# Altium PCB PCBdis.PcbDoc
Units mil, origin at the board's own origin, x right, y up, seen from the top; angles counter-clockwise.
Board outline 3820 x 2995 mil, 2 copper layers (Top Layer, Bottom Layer); 31 components, 39 nets, 172 pads, 23 vias.
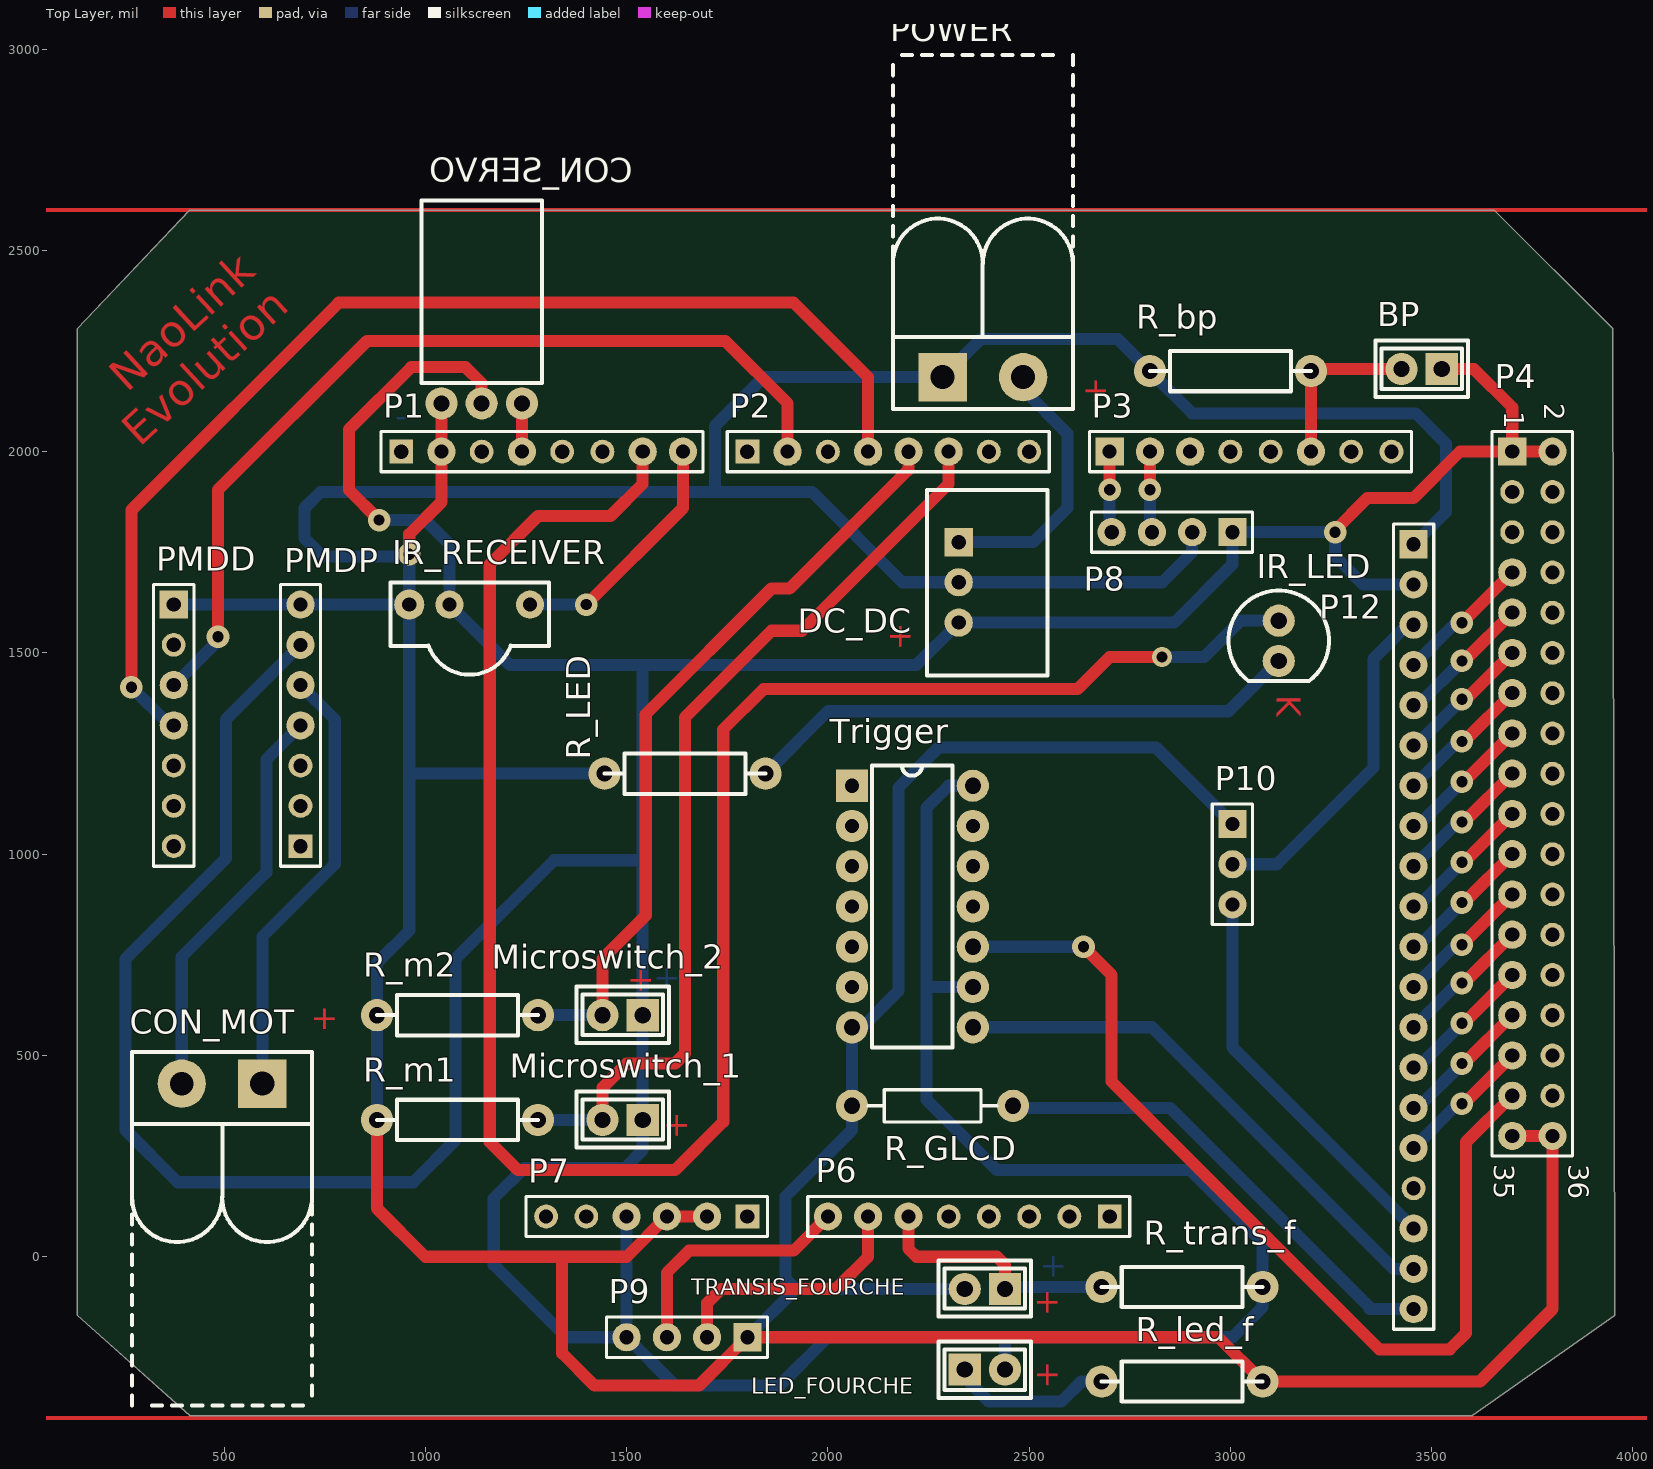
[diagram p0: Top Layer view]
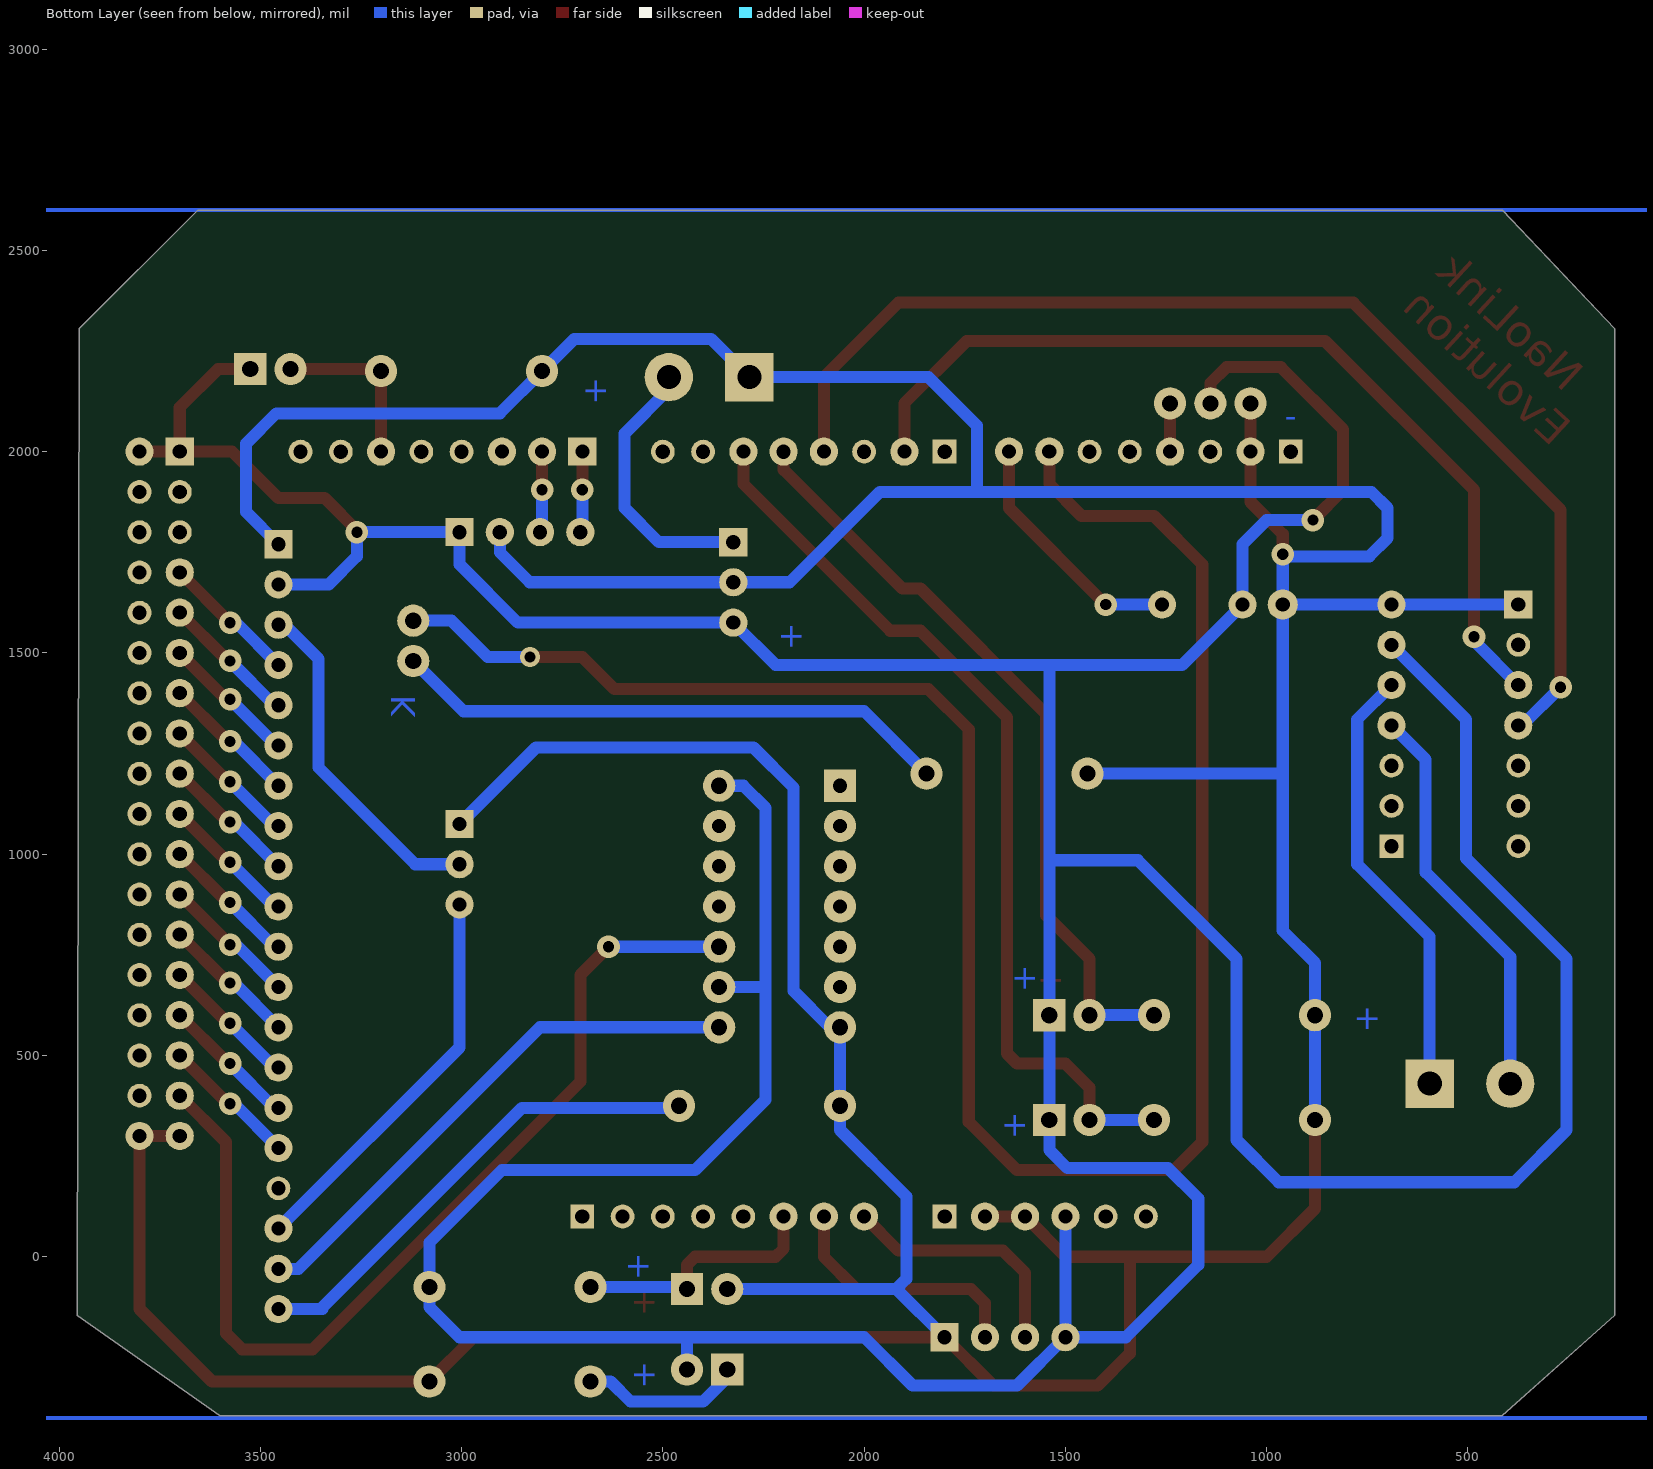
[diagram p1: Bottom Layer view, seen from below]

## Layer stack, top to bottom
Top Solder: solder mask 0.4, Solder Resist, Dk 3.5
Top Layer: signal copper 1.4
Dielectric1: dielectric 12.6, FR-4, Dk 4.8
Bottom Layer: signal copper 1.4
Bottom Solder: solder mask 0.4, Solder Resist, Dk 3.5

## Board outline
3655,2600 3950,2305 3955,-145 3600,-395 415,-395 135,-145 135,570 135,1265 135,2305 415,2600

## Design rules (kind name [scope] priority, off if disabled: settings)
Clearance Clearance_plan [InPolygon] p1: gap=20
Clearance Clearance_1 [All] p2: gap=10
PolygonConnect [All] p1: connectstyle=Relief reliefconductorwidth=10 reliefentries=4 polygonreliefangle="90 Angle" airgapwidth=10
RoomDefinition Sheet_distributeur [InNet('GND')] p1: confinementstyle=ConfineIn formatcopy=TRUE lockcomponents=FALSE outline 565,-490 745,-490 745,-575 565,-575
RoutingVias [All] p1: holewidth=28 width=50 viastyle="Through Hole" minholewidth=28 minwidth=50 maxholewidth=28 maxwidth=50
SilkToSolderMaskClearance SilkscreenOverComponentPads [IsPad] p1: minsilkscreentomaskgap=10 clearancetoexposedcopper=TRUE
SolderMaskExpansion [All] p1: expansion=4
Width [All] p1: maxlimit=30 minlimit=10 preferedwidth=30 minimp=50.000000 maximp=50.000000 favimp=50.000000
28 further rules are at their usual default settings.

## Components (designator, comment, footprint, x,y, rotation, side; value= is the part's Value field where it differs from the comment)
BP "Connecteur bipastille" Conn_SIG_2pts 3525,2205 r0 top
CON_MOT "Alim" "Miniconnect 2pts"#1 595,430 r270 top
CON_SERVO "Connecteur Autocom 3pts" "Autocom HE14 - 3 - Coudé" 1240,2120 r90 top
DC_DC "TSR 1-2450" TSR-1 2325,1775 r270 top
IR_LED "générique" LED-5 3120,1480 r90 top
IR_RECEIVER "TSOP 31236" "TSOP 31236" 960,1620 r90 top
LED_FOURCHE "Connecteur bipastille" Conn_SIG_2pts 2340,-280 r180 top
Microswitch_1 "Connecteur bipastille" Conn_SIG_2pts 1540,340 r0 top
Microswitch_2 "Connecteur bipastille" Conn_SIG_2pts 1540,600 r0 top
P1 "con_pwm_8_13" HDR1X8#1 940,2000 r0 top
P2 "con_pwm_0_7" HDR1X8#2 1800,2000 r0 top
P3 "con_comm_14_21" HDR1X8#3 2700,2000 r0 top
P4 "con_digital" HDR2X18 3700,2000 r270 top
P6 "con_analog_0_7" HDR1X8#4 2700,100 r180 top
P7 "con_power" HDR1X6 1800,100 r180 top
P8 "CON_BT" HDR1X4#1 3005,1800 r180 top
P9 "CON_JAUGE" HDR1X4#2 1800,-200 r180 top
P10 "pot_lcd" HDR1X3 3005,1075 r270 top
P12 "CON_GLCD" HDR1X20 3455,1770 r270 top
PMDD "MOTOR_DRIVER_DATA" HDR1X7#1 375,1620 r270 top
PMDP "MOTOR_DRIVER_POWER" HDR1X7#2 690,1020 r90 top
POWER "Alim" "Miniconnect 2pts"#2 2285,2185 r90 top
R_bp "1K" Axial_4 3200,2200 r180 top
R_GLCD "220" AXIAL-0.4 2260,375 r0 top
R_LED "100" Axial_4 1445,1200 r0 top
R_led_f "660" Axial_4 2680,-310 r0 top
R_m1 "1K" Axial_4 1280,340 r180 top
R_m2 "1K" Axial_4 1280,600 r180 top
R_trans_f "27k" Axial_4 2680,-75 r0 top
TRANSIS_FOURCHE "Connecteur bipastille" Conn_SIG_2pts 2440,-80 r0 top
Trigger "74HC126" DIP_14 2060,1170 r0 top

## Footprints (in the part's own frame and the unit in brackets; to place one, negate y for a bottom-side part, rotate by r counter-clockwise, add the part's x,y. Pads: shape width x height; smd on the part's side, far side on the other; paste and mask are expansions set on the pad)
"Autocom HE14 - 3 - Coudé" [mil] "Connecteur 3 points Autocom série HE14, coudé"
  round 80 hole 40: 1(0,0) 2(0,100) 3(0,200)
  silkscreen extent 50,-50 504,250, body extent -13,-50 503,250, height 313
AXIAL-0.4 [mil] "Axial Device, Thru-Hole; 2 Leads; 0.4 in Pin Spacing"
  round 80 hole 40: 1(-200,0) 2(200,0)
  silkscreen extent -160,-40 160,40
Axial_4 [mil] "Résistance 1/4 ou 1/2 Watt"
  round 80 hole 40: 1(0,0) 2(400,0)
  silkscreen extent 0,-50 400,50, body extent -12,-45 412,46, height 116
Conn_SIG_2pts [mil] "connecteur pour composants déportés faible puissance"
  rect 80x80 hole 40: 1(0,0)
  round 80 hole 40: 2(-100,0)
  silkscreen extent -165,-69 65,71
DIP_14 [mil]
  rect 80x80 hole 35: 1(0,0)
  round 80 hole 35: 2(0,-100) 3(0,-200) 4(0,-300) 5(0,-400) 6(0,-500) 11(300,-300) 12(300,-200) 13(300,-100)
  round 80 hole 40: 7(0,-600) 8(300,-600) 9(300,-500) 10(300,-400) 14(300,0)
  silkscreen extent 49,-650 249,50
HDR1X3 [mil] "Connector; Header; 3 Position"
  rect 70x70 hole 35: 1(0,0)
  round 70 hole 35.43: 2(100,0) 3(200,0)
  silkscreen extent -50,-50 250,50
HDR1X4#1 [mil] "Connector; Header; 4 Position"
  rect 70x70 hole 35.43: 1(0,0)
  round 70 hole 35.43: 2(100,0) 3(200,0) 4(300,0)
  silkscreen extent -50,-50 350,50
HDR1X4#2 [mil] "Connector; Header; 4 Position"
  rect 70x70 hole 35: 1(0,0)
  round 70 hole 35: 2(100,0) 3(200,0) 4(300,0)
  silkscreen extent -50,-50 350,50
HDR1X6 [mil] "Connector; Header; 6 Position"
  rect 59.06x59.06 hole 35.43: 1(0,0)
  round 70 hole 35: 2(100,0) 3(200,0) 4(300,0)
  round 59.06 hole 35.43: 5(400,0) 6(500,0)
  silkscreen extent -50,-50 550,50
HDR1X7#1 [mm] "Connector; Header; 7 Position"
  rect 1.778x1.778 hole 0.889: 1(0,0)
  round 1.5 hole 0.9: 2(2.54,0) 5(10.16,0) 6(12.7,0) 7(15.24,0)
  round 1.778 hole 0.889: 3(5.08,0) 4(7.62,0)
  silkscreen extent -1.27,-1.27 16.51,1.27
HDR1X7#2 [mm] "Connector; Header; 7 Position"
  rect 1.5x1.5 hole 0.9: 1(0,0)
  round 1.5 hole 0.9: 2(2.54,0) 3(5.08,0)
  round 1.778 hole 0.889: 4(7.62,0) 5(10.16,0) 6(12.7,0) 7(15.24,0)
  silkscreen extent -1.27,-1.27 16.51,1.27
HDR1X8#1 [mil] "Connector; Header; 8 Position"
  rect 59.06x59.06 hole 35.43: 1(0,0)
  round 70 hole 35: 2(100,0) 4(300,0) 7(600,0) 8(700,0)
  round 59.06 hole 35.43: 3(200,0) 5(400,0) 6(500,0)
  silkscreen extent -50,-50 750,50
HDR1X8#2 [mil] "Connector; Header; 8 Position"
  rect 59.06x59.06 hole 35.43: 1(0,0)
  round 70 hole 35: 2(100,0) 4(300,0) 6(500,0)
  round 59.06 hole 35.43: 3(200,0) 7(600,0) 8(700,0)
  round 70 hole 35.43: 5(400,0)
  silkscreen extent -50,-50 750,50
HDR1X8#3 [mil] "Connector; Header; 8 Position"
  rect 70x70 hole 35: 1(0,0)
  round 70 hole 35: 2(100,0) 3(200,0) 6(500,0)
  round 59.06 hole 35.43: 4(300,0) 5(400,0) 7(600,0) 8(700,0)
  silkscreen extent -50,-50 750,50
HDR1X8#4 [mil] "Connector; Header; 8 Position"
  rect 59.06x59.06 hole 35.43: 1(0,0)
  round 59.06 hole 35.43: 2(100,0) 3(200,0) 4(300,0) 5(400,0)
  round 70 hole 35: 6(500,0) 7(600,0) 8(700,0)
  silkscreen extent -50,-50 750,50
HDR1X20 [mil] "Connector; Header; 20 Position"
  rect 70x70 hole 35: 1(0,0)
  round 70 hole 35: 2(100,0) 3(200,0) 4(300,0) 5(400,0) 6(500,0) 7(600,0) 8(700,0) 9(800,0) 10(900,0) 11(1000,0) 12(1100,0) 13(1200,0) 14(1300,0) 15(1400,0) 16(1500,0) 18(1700,0) 19(1800,0) 20(1900,0)
  round 59.06 hole 35.43: 17(1600,0)
  silkscreen extent -50,-50 1950,50
HDR2X18 [mil] "Connector; Header; 18x2 Position"
  rect 70x70 hole 35: 1(0,0)
  round 70 hole 35: 2(0,100) 7(300,0) 9(400,0) 11(500,0) 13(600,0) 15(700,0) 17(800,0) 19(900,0) 21(1000,0) 23(1100,0) 25(1200,0) 27(1300,0) 29(1400,0) 31(1500,0) 33(1600,0) 35(1700,0) 36(1700,100)
  round 59.06 hole 35.43: 3(100,0) 4(100,100) 5(200,0) 6(200,100) 8(300,100) 10(400,100) 12(500,100) 14(600,100) 16(700,100) 18(800,100) 20(900,100) 22(1000,100) 24(1100,100) 26(1200,100) 28(1300,100) 30(1400,100) 32(1500,100) 34(1600,100)
  silkscreen extent -50,-50 1750,150
LED-5 [mil] "Led trous traversant diamètre 5mm"
  round 80 hole 40: 1(0,0) 2(100,0)
  silkscreen extent -50,-125 175,125, body extent -46,-118 168,119, height 485
"Miniconnect 2pts"#1 [mil] "Connecteur Entrelec Miniconnect 2 points"
  rect 120x120 hole 60: 1(0,0)
  round 120 hole 59.06: 2(0,-200)
  silkscreen extent -79,-324 800,124, body extent -79,-339 394,140, height 339
"Miniconnect 2pts"#2 [mil] "Connecteur Entrelec Miniconnect 2 points"
  rect 120x120 hole 60: 1(0,0)
  round 120 hole 60: 2(0,-200)
  silkscreen extent -79,-324 800,124, body extent -79,-339 394,140, height 339
"TSOP 31236" [mil] "Récepteur IR 950nm"
  round 75 hole 35: 1(0,0)
  round 70 hole 35: 2(0,-100) 3(0,-300)
  silkscreen extent -174,-347 55,47
TSR-1 [mil] "DC/DC Converters  TSR-1 Series - Footprint"
  rect 70x70 hole 35: 1(0,0)
  round 70 hole 35: 2(99.41,0) 3(199.8,0)
  silkscreen extent -130,-79 331,220, body extent -131,-78 330,221, height 402

## Part data
BP LED_FOURCHE Microswitch_1 Microswitch_2 TRANSIS_FOURCHE: "Double pastilles pour souder un moteur"
CON_MOT POWER: library part "Connecteur Alimentation", "Connecteur d'alimentation"
CON_SERVO: library part "Connecteur Autocom 3 pts", "connecteur autocom HE14 3 pts"
DC_DC: "DC/DC Converters  TSR-1 Series, 1 A"
IR_LED: library part "LED générique", "Typical GaAs LED Yellow"
IR_RECEIVER: "Récepteur IR 36KHz 950nm"
P1 P2 P3 P6: library part "Header 8", "Header, 8-Pin"
P4: library part "Header 18X2", "Header, 18-Pin, Dual row"
P7: library part "Header 6", "Header, 6-Pin"
P8 P9: library part "Header 4", "Header, 4-Pin"
P10: library part "Header 3", "Header, 3-Pin"
P12: library part "Header 20", "Header, 20-Pin"
PMDD PMDP: library part "Header 7", "Header, 7-Pin"
R_bp R_LED R_led_f R_m1 R_m2 R_trans_f: library part Res, "Resistance"
R_GLCD: library part Res2, "Resistor"
Trigger: library part 74XX126, "Quad Buffer/line driver; 3-state"

## Via types
v1: diameter 56, hole 28, Top Layer to Bottom Layer, 22 vias
v2: diameter 50, hole 28, Top Layer to Bottom Layer, 1 vias

## Nets (pads, with @x,y where several pads share a name; then routed paths per layer and width w, separated by ;. In a path a pad name is that pad's centre, name@x,y a point inside that pad or via, vN(x,y) a via of type N, cw(c..) or ccw(c..) an arc to the next point about the centre after c; other vN are vias at no path point)
12V: DC_DC.1 POWER.2 | length 675.8
  Bottom Layer w30: DC_DC.1 2510,1775 2595,1860 2595,2045 2485,2155 POWER.2
A: P12.19 Trigger.8 | length 1343.5
  Bottom Layer w30: Trigger.8 2805,570 3405,-30 P12.19
CS1: P4.29 P12.15 | length 328.2
  Top Layer w30: v1@3585,485 P4.29
  Bottom Layer w30: P12.15 3465,370 v1(3575,480)
CS2: P4.31 P12.16 | length 328.2
  Top Layer w30: v1@3585,385 P4.31
  Bottom Layer w30: P12.16 3565,380 v1(3575,380)
DB0: P4.13 P12.7 | length 328.2
  Top Layer w30: v1@3585,1285 P4.13
  Bottom Layer w30: P12.7 3565,1280 v1(3575,1280)
DB1: P4.15 P12.8 | length 328.2
  Top Layer w30: v1@3585,1185 P4.15
  Bottom Layer w30: P12.8 3465,1070 v1(3575,1180)
DB2: P4.17 P12.9 | length 328.2
  Top Layer w30: v1@3585,1085 P4.17
  Bottom Layer w30: P12.9 3565,1080 v1(3575,1080)
DB3: P4.19 P12.10 | length 328.2
  Top Layer w30: v1@3585,985 P4.19
  Bottom Layer w30: P12.10 3465,870 v1(3575,980)
DB4: P4.21 P12.11 | length 328.2
  Top Layer w30: v1@3585,885 P4.21
  Bottom Layer w30: P12.11 3465,770 v1(3575,880)
DB5: P4.23 P12.12 | length 326.1
  Top Layer w30: v1@3585,785 P4.23
  Bottom Layer w30: P12.12 3560,775 v1(3575,775)
DB6: P4.25 P12.13 | length 328.2
  Top Layer w30: v1@3585,685 P4.25
  Bottom Layer w30: P12.13 3565,680 v1(3575,680)
DB7: P4.27 P12.14 | length 328.2
  Top Layer w30: v1@3585,585 P4.27
  Bottom Layer w30: P12.14 3465,470 v1(3575,580)
DT: P6.8 P9.3 | length 618
  Top Layer w30: P9.3 1600,-40 1655,15 1915,15 P6.8
E_EN: P4.11 P12.6 | length 330.3
  Top Layer w30: v1@3585,1385 P4.11
  Bottom Layer w30: P12.6 3460,1270 v1(3575,1385)
GND: CON_SERVO.3 DC_DC.2 IR_RECEIVER.1 P1.2 P4.35 P4.36 P7.2 P7.3 P8.2 P9.1 P10.1 P12.1 PMDD.1 PMDP.7 POWER.1 R_bp.2 R_GLCD.1 R_LED.1 R_led_f.2 R_m1.2 R_m2.2 TRANSIS_FOURCHE.2 Trigger.7 | length 15619.2
  Top Layer w30: R_m1.2 880,120 1000,0 1340,0 ; v1(960,1745) 960,1795 1040,1875 P1.2 CON_SERVO.3 ; P7.2 P7.3 1500,0 1340,0 ; P4.35 P4.36 3800,-130 3620,-310 R_led_f.2 2970,-200 P9.1 1680,-320 1420,-320 1340,-240 1340,0
  Bottom Layer w30: PMDD.1 PMDP.7 IR_RECEIVER.1 ; R_m1.2 R_m2.2 880,730 960,810 960,1205 ; R_LED.1 965,1200 960,1205 ; P9.1 1920,-80 ; TRANSIS_FOURCHE.2 1920,-80 ; P8.2 2905,1750 2830.59,1675.59 DC_DC.2 2185,1675.59 1960.59,1900 1720,1900 ; P10.1 2815,1265 2275,1265 2175,1165 2175,660 2085,570 Trigger.7 R_GLCD.1 2060,315 1895,150 1895,-55 1920,-80 ; P12.1 3535,1850 3535,2020 3460,2095 2905,2095 R_bp.2 2720,2280 2380,2280 POWER.1 1840,2185 1720,2065 1720,1900 ; 960,1205 IR_RECEIVER.1 ; IR_RECEIVER.1 v1(960,1745) 955,1740 745,1740 700,1785 700,1860 740,1900 1720,1900
IR_RECEIV: IR_RECEIVER.3 P1.8 | length 619.4
  Top Layer w30: v1(1400,1620) 1640,1860 P1.8
  Bottom Layer w30: IR_RECEIVER.3 v1(1400,1620)
IR_TRANS: IR_LED.2 P1.7 | length 5103.4
  Top Layer w30: P1.7 1540,1920 1460,1840 1280,1840 1160,1720 1160,285 1230,215 1620,215 1740,335 1740,1310 1840,1410 2620,1410 2700,1490 v2(2830,1490)
  Bottom Layer w30: v2(2830,1490) 2935,1490 3025,1580 IR_LED.2
NetCON_MOT_1: CON_MOT.1 PMDP.5 | length 1099.8
  Bottom Layer w30: CON_MOT.1 595,795 775,975 775,1335 PMDP.5
NetCON_MOT_2: CON_MOT.2 PMDP.4 | length 1012.2
  Bottom Layer w30: CON_MOT.2 395,745 605,955 605,1235 PMDP.4
NetIR_LED_1: IR_LED.1 R_LED.2 | length 1391
  Bottom Layer w30: R_LED.2 2000,1355 2995,1355 IR_LED.1
NetLED_FOURCHE_1: LED_FOURCHE.1 R_led_f.1 | length 405.6
  Bottom Layer w30: LED_FOURCHE.1 2340,-300 2400,-360 2580,-360 2630,-310 R_led_f.1
NetP12_20: P12.20 R_GLCD.2 | length 1205
  Bottom Layer w30: R_GLCD.2@2460,370 2850,370 3345,-125 3345,-130 P12.20
PWM_MOT_1: P2.2 PMDD.3 | length 2288
  Top Layer w30: PMDD.3 PMDD.3@380,1420 ; v1(485,1540) 485,1905 855,2275 1745,2275 1900,2120 P2.2
  Bottom Layer w30: PMDD.3 485,1530 v1(485,1540)
PWM_MOT_2: P2.4 PMDD.4 | length 2889.3
  Top Layer w30: v1(270,1415) 270,1855 785,2370 1915,2370 2100,2185 P2.4
  Bottom Layer w30: v1(270,1415) 365,1320 PMDD.4
PWM_SERVO: CON_SERVO.1 P1.4 | length 120
  Top Layer w30: P1.4 CON_SERVO.1
R/W: P4.9 P12.5 | length 333.2
  Top Layer w30: v1@3585,1485 P4.9 P4.9@3695,1600
  Bottom Layer w30: P12.5 3465,1370 v1(3575,1480)
RS: P4.7 P12.4 | length 340.3
  Top Layer w30: v1(3575,1575) P4.7
  Bottom Layer w30: P12.4 3560,1575 v1(3575,1575)
RST_GLCD: P12.17
RXD: P3.2 P8.3 | length 202.1
  Top Layer w30: v1(2800,1905) P3.2
  Bottom Layer w30: v1(2800,1905) 2800,1805 P8.3
SCK: P6.7 P9.2 | length 632.6
  Top Layer w30: P9.2 1700,-115 1735,-80 2020,-80 2100,0 P6.7
SIG_BP: BP.2 P3.6 R_bp.1 | length 427.1
  Top Layer w30: P3.6 R_bp.1 3205,2205 BP.2
SIG_FOURCHE: P6.6 R_trans_f.1 TRANSIS_FOURCHE.1 | length 638.6
  Top Layer w30: P6.6 2200,20 2220,0 2420,0 2440,-20 TRANSIS_FOURCHE.1
  Bottom Layer w30: TRANSIS_FOURCHE.1 2445,-75 R_trans_f.1
SIG_M1: Microswitch_1.2 P2.6 R_m1.1 | length 2290.4
  Top Layer w30: Microswitch_1.2 1440,420 1500.03,480.03 1620,480.03 1645,505.03 1645,1340 1860,1555 1935,1555 2300,1920 P2.6
  Bottom Layer w30: R_m1.1 Microswitch_1.2
SIG_M2: Microswitch_2.2 P2.5 R_m2.1 | length 1901.2
  Top Layer w30: Microswitch_2.2 1440,740 1547.5,847.5 1547.5,1347.5 1860,1660 1905,1660 2200,1955 P2.5
  Bottom Layer w30: R_m2.1 Microswitch_2.2
TRIGGER_UC: P4.33 Trigger.10 | length 2458.7
  Top Layer w30: v1(2635,770) 2705,700 2705,435 3370,-230 3545,-230 3585,-190 3585,285 P4.33 P4.33@3700,390
  Bottom Layer w30: Trigger.10 v1(2635,770)
TXD: P3.1 P8.4 | length 202.1
  Top Layer w30: v1(2700,1905) P3.1
  Bottom Layer w30: v1(2700,1905) 2700,1805 P8.4
V0: P10.2 P12.3 | length 854.6
  Bottom Layer w30: P10.2 3115,975 3355,1215 3355,1485 3440,1570 P12.3
VCC: BP.1 CON_SERVO.2 DC_DC.3 IR_RECEIVER.2 LED_FOURCHE.2 Microswitch_1.1 Microswitch_2.1 P4.1 P4.2 P7.4 P8.1 P9.4 P12.2 PMDP.6 R_trans_f.2 Trigger.9 Trigger.14 | length 14477.1
  Top Layer w30: v1(885,1830) 810,1905 810,2055 965,2210 1100,2210 1140,2170 CON_SERVO.2 ; v1(3260,1800) 3255,1800 3340,1885 3455,1885 3570,2000 P4.1 ; BP.1 3605,2205 3700,2110 P4.1 ; P4.2 P4.1
  Bottom Layer w30: PMDP.6 505,1335 505,990 255,740 255,315 385,185 970,185 1075,290 1075,740 1320,985 1540,985 ; v1(885,1830) 1000,1830 1060,1770 IR_RECEIVER.2 1210,1470 1540,1470 ; P7.4 P9.4 ; Trigger.9 2245,670 ; Trigger.14 2300,1170 2245,1115 2245,670 ; LED_FOURCHE.2 2440,-200 ; P12.2 3330,1670 3260,1740 v1(3260,1800) P8.1 3005,1720 2860.2,1575.2 DC_DC.3 2219.8,1470 1540,1470 ; P9.4 1350,-200 1170,-20 1170,145 1245,220 1495,220 1540,265 Microswitch_1.1 Microswitch_2.1 1540,985 ; P9.4 1620,-320 1880,-320 2000,-200 2440,-200 ; 1540,985 1540,1470 ; 2245,670 2245,390 2420,215 2900,215 3080,35 R_trans_f.2 3080,-125 3005,-200 2440,-200
VEE: P10.3 P12.18 | length 991.4
  Bottom Layer w30: P10.3 3005,520 P12.18
pads on no net: P1.1 P1.3 P1.5 P1.6 P2.1 P2.3 P2.7 P2.8 P3.3 P3.4 P3.5 P3.7 P3.8 P4.3 P4.4 P4.5 P4.6 P4.8 P4.10 P4.12 P4.14 P4.16 P4.18 P4.20 P4.22 P4.24 P4.26 P4.28 P4.30 P4.32 P4.34 P6.1 P6.2 P6.3 P6.4 P6.5 P7.1 P7.5 P7.6 PMDD.2 PMDD.5 PMDD.6 PMDD.7 PMDP.1 PMDP.2 PMDP.3 Trigger.1 Trigger.2 Trigger.3 Trigger.4 Trigger.5 Trigger.6 Trigger.11 Trigger.12 Trigger.13

## Other copper
Top Layer:
  text "+" at 2640,2185 h60 r270
  text "NaoLink" at 260,2145 h80 r42.6
  text "Evolution" at 290,2010 h80 r42.6
  text "+" at 2155,1575 h60 r270
  text "K" at 3115,1395 h60 r270
  text "+" at 1510,720 h60 r270
  text "+" at 715,565 h60
  text "+" at 1600,360 h60 r270
  text "+" at 2520,-80 h60 r270
  text "+" at 2520,-260 h60 r270
Bottom Layer:
  text "+" at 2640,2185 h60 r270
  text "-" at 925,2060 h60
  text "+" at 2155,1575 h60 r270
  text "K" at 3115,1395 h60 r270
  text "+" at 1575,725 h60 r270
  text "+" at 715,565 h60
  text "+" at 1600,360 h60 r270
  text "+" at 2535,10 h60 r270
  text "+" at 2520,-260 h60 r270
Multi-Layer:
  lines w10: -900,-100 -600,-400 4800,-400 5100,-100 5100,2300 4800,2600 -600,2600 -900,2300 -900,-100

## Silkscreen, mask and mechanical layers (free items; w line width, h text height)
Drill Drawing:
  text "-" at 925,2060 h60

## Text inside footprints (layer, text, board x,y; h text height)
P4: Top Overlay "36" at 3840,230 h50 r270; Top Overlay "35" at 3655,230 h50 r270; Top Overlay "1" at 3680,2100 h50 r270; Top Overlay "2" at 3780,2120 h50 r270